# EAGLE board gate433 (EAGLE 7.6.0)
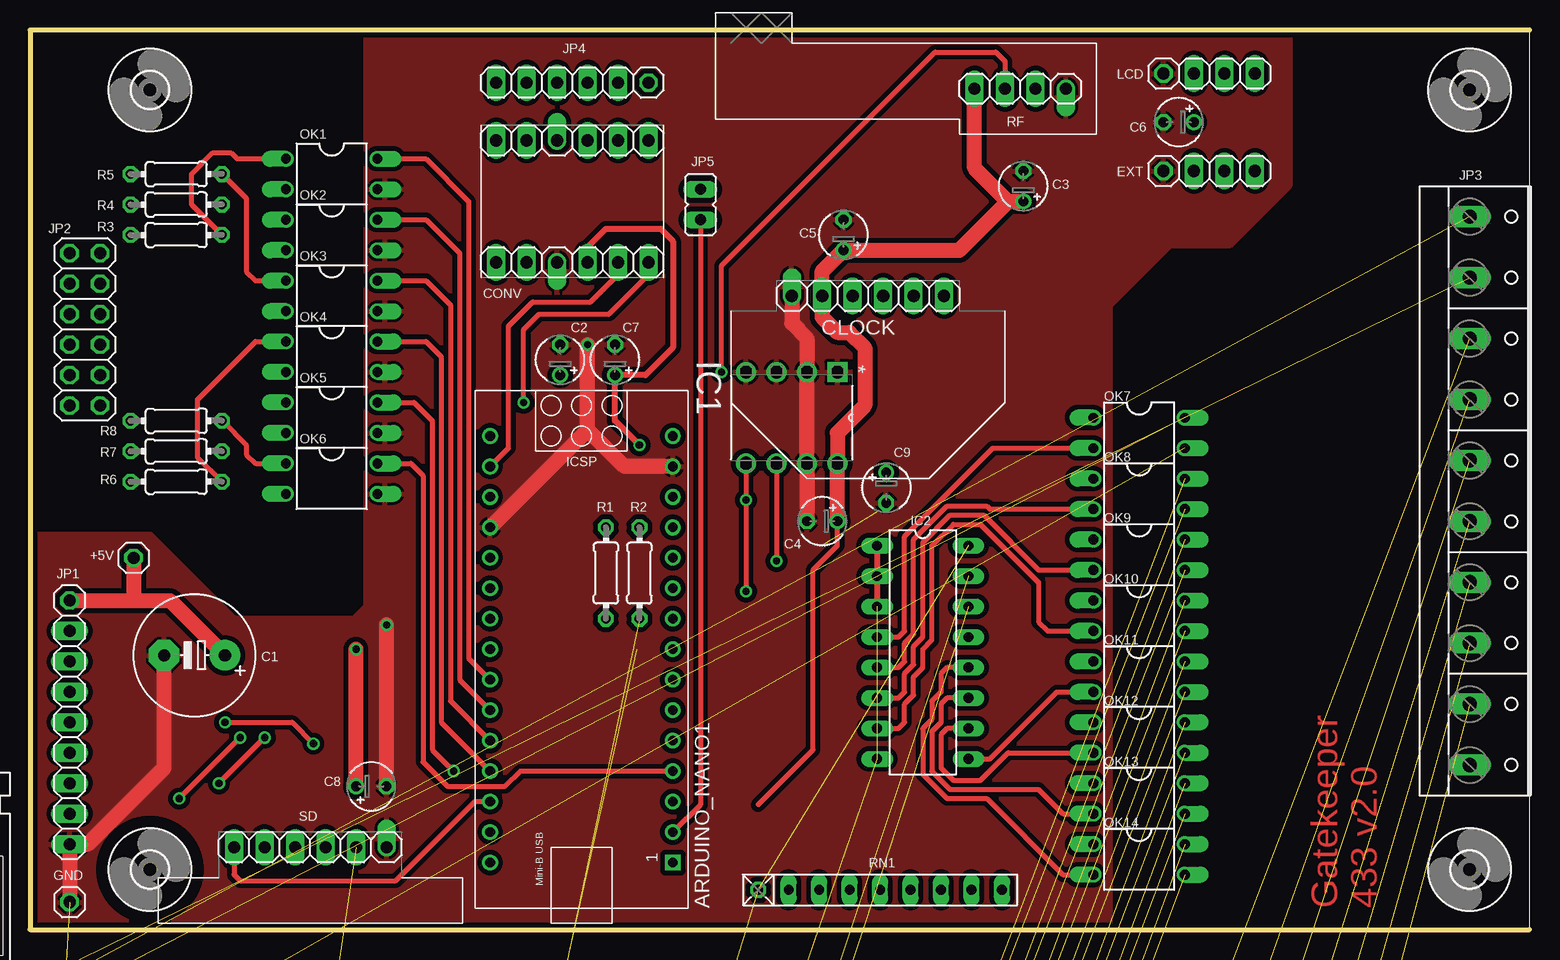
[diagram p0: board, top side]
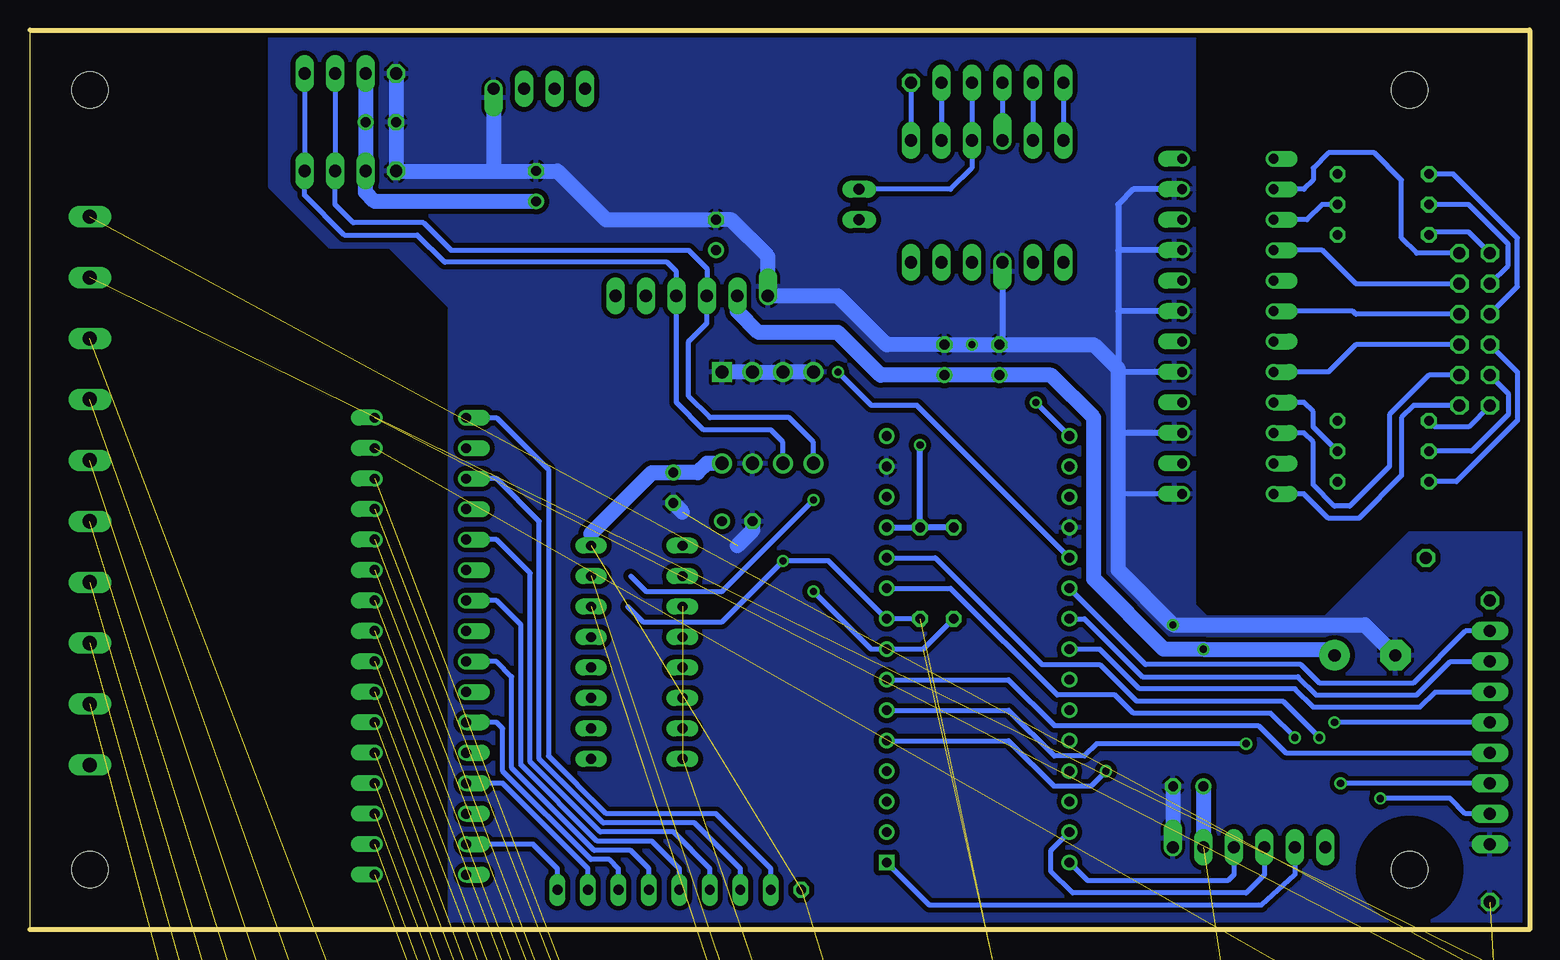
[diagram p1: board, bottom side, seen from below]

Size 125 x 75 mm. Coordinates in mm from the lower left corner, seen from the top.
Outline: 0,0 125,0 125,75 0,75 0,0
Copper layers (1*16): Top 0.035mm / dielectric 1.5mm / Bottom 0.035mm
Design rules "HuGyártás": minimum track width 10mil, minimum drill 0.5mm, track to track 8mil, track to pad 8mil, pad to pad 8mil, via to via 8mil, smd to smd 8mil, copper to edge 8mil, drill to drill 8mil, minimum pad ring 10mil, minimum via ring 8mil, stop-mask expansion 4mil, vias tented up to drill 20mil, thermal gap 10mil

## Footprints (pad centres in the part's own frame; a part is rotated, then mirrored left to right if it is on the bottom)
1X01 = drill 1.016 octagon: 1 0,0
ARDUINO_NANO = drill 0.8 square: 1 -20.32,-7.62 | drill 0.8: 2 -17.78,-7.62; 3 -15.24,-7.62; 4 -12.7,-7.62; 5 -10.16,-7.62; 6 -7.62,-7.62; 7 -5.08,-7.62; 8 -2.54,-7.62; 9 0,-7.62; 10 2.54,-7.62; 11 5.08,-7.62; 12 7.62,-7.62; 13 10.16,-7.62; 14 12.7,-7.62; 15 15.24,-7.62; 16 15.24,7.62; 17 12.7,7.62; 18 10.16,7.62; 19 7.62,7.62; 20 5.08,7.62; 21 2.54,7.62; 22 0,7.62; 23 -2.54,7.62; 24 -5.08,7.62; 25 -7.62,7.62; 26 -10.16,7.62; 27 -12.7,7.62; 28 -15.24,7.62; 29 -17.78,7.62; 30 -20.32,7.62
E5-10,5 = drill 1.016 pad 2.54: + -2.54,0 | drill 1.016 pad 2.54 octagon: - 2.54,0
TT2D4 = drill 0.813: + -1.27,0 | drill 0.813 octagon: - 1.27,0
ZS-042 = drill 1.016 offset: 1 -6.35,0 | drill 1.016 long: 2 -3.81,0; 3 -1.27,0; 4 1.27,0; 5 3.81,0; 6 6.35,0
LEVELCONV = drill 1.016 long: 1 -6.35,-5.08; 2 -3.81,-5.08; 3 -1.27,-5.08; 5 3.81,-5.08; 6 6.35,-5.08; 7 6.35,5.08; 8 3.81,5.08; 10 -1.27,5.08; 11 -3.81,5.08; 12 -6.35,5.08 | drill 1.016 offset: 4 1.27,-5.08; 9 1.27,5.08
ZDIO-5 = drill 0.813 octagon: A 2.54,0; C -2.54,0
1X04 = drill 1.016 octagon: 1 -3.81,0 | drill 1.016 long: 2 -1.27,0; 3 1.27,0; 4 3.81,0
DIP254P762X533-8 = drill 1.118 square: 1 -7.62,7.62 | drill 1.118: 2 -7.62,5.08; 3 -7.62,2.54; 4 -7.62,0; 5 0,0; 6 0,2.54; 7 0,5.08; 8 0,7.62
DIL16 = drill 0.813 long: 1 -8.89,-3.81; 2 -6.35,-3.81; 3 -3.81,-3.81; 4 -1.27,-3.81; 5 1.27,-3.81; 6 3.81,-3.81; 7 6.35,-3.81; 8 8.89,-3.81; 9 8.89,3.81; 10 6.35,3.81; 11 3.81,3.81; 12 1.27,3.81; 13 -1.27,3.81; 14 -3.81,3.81; 15 -6.35,3.81; 16 -8.89,3.81
1X09 = drill 1.016 octagon: 1 -10.16,0 | drill 1.016 long: 2 -7.62,0; 3 -5.08,0; 4 -2.54,0; 5 0,0; 6 2.54,0; 7 5.08,0; 8 7.62,0; 9 10.16,0
2X06 = drill 1.016 octagon: 1 -6.35,-1.27; 2 -6.35,1.27; 3 -3.81,-1.27; 4 -3.81,1.27; 5 -1.27,-1.27; 6 -1.27,1.27; 7 1.27,-1.27; 8 1.27,1.27; 9 3.81,-1.27; 10 3.81,1.27; 11 6.35,-1.27; 12 6.35,1.27
W237-10P = drill 1.194 long: 1 -22.86,-0.635; 2 -17.78,-0.635; 3 -12.7,-0.635; 4 -7.62,-0.635; 5 -2.54,-0.635; 6 2.54,-0.635; 7 7.62,-0.635; 8 12.7,-0.635; 9 17.78,-0.635; 10 22.86,-0.635
1X06 = drill 1.016 octagon: 1 -6.35,0 | drill 1.016 long: 2 -3.81,0; 3 -1.27,0; 4 1.27,0; 5 3.81,0; 6 6.35,0
JP1 = drill 0.914 long: 1 0,-1.27; 2 0,1.27
2X08 = drill 1.016 octagon: 1 -8.89,-1.27; 2 -8.89,1.27; 3 -6.35,-1.27; 4 -6.35,1.27; 5 -3.81,-1.27; 6 -3.81,1.27; 7 -1.27,-1.27; 8 -1.27,1.27; 9 1.27,-1.27; 10 1.27,1.27; 11 3.81,-1.27; 12 3.81,1.27; 13 6.35,-1.27; 14 6.35,1.27; 15 8.89,-1.27; 16 8.89,1.27
DIL04 = drill 0.813 offset: 1 -1.27,-3.81; 2 1.27,-3.81; 3 1.27,3.81; 4 -1.27,3.81
TO220BH = drill 1.118 long: D 0,-6.35; G -2.54,-6.35; S 2.54,-6.35 | hole 3.302: 0,11.176
0204/7 = drill 0.813 octagon: 1 -3.81,0; 2 3.81,0
RF = drill 1.016 offset: 1 -3.81,0 | drill 1.016 long: 2 -1.27,0; 3 1.27,0; 4 3.81,0
RN-9 = drill 0.813 octagon: 1 -10.16,0 | drill 0.813 long: 2 -7.62,0; 3 -5.08,0; 4 -2.54,0; 5 0,0; 6 2.54,0; 7 5.08,0; 8 7.62,0; 9 10.16,0
MICROSD = drill 1.016 offset: 1 -6.35,0 | drill 1.016 long: 2 -3.81,0; 3 -1.27,0; 4 1.27,0; 5 3.81,0; 6 6.35,0
3,0 = hole 3: 0,0

## Placement (x,y rotation side)
+5V  [1X01]  8.64,30.99 0 top
ARDUINO_NANO1  [ARDUINO_NANO]  45.97,25.91 90 top
C1  3300uF/10V  [E5-10,5]  13.72,22.86 180 top
C2  10uF/16V  [TT2D4]  44.2,47.5 90 top
C3  1uF  [TT2D4]  82.8,61.98 90 top
C4  1uF  [TT2D4]  66.04,34.04 180 top
C5  1uF  [TT2D4]  67.82,57.91 90 top
C6  1uF  [TT2D4]  95.76,67.31 180 top
C7  1uF  [TT2D4]  48.77,47.5 90 top
C8  100nF  [TT2D4]  28.45,11.94 0 top
C9  1uF  [TT2D4]  71.37,36.83 270 top
CLOCK  ZS-042  [ZS-042]  69.85,52.83 0 top
CONV  LEVELCONV  [LEVELCONV]  45.21,60.71 180 top
D1  [ZDIO-5]  -8.38,-21.34 0 top  (outside the outline)
D2  [ZDIO-5]  -8.38,-289.56 0 top  (outside the outline)
D3  [ZDIO-5]  -8.38,-318.26 0 top  (outside the outline)
D4  [ZDIO-5]  -8.38,-346.96 0 top  (outside the outline)
D5  [ZDIO-5]  -8.38,-375.67 0 top  (outside the outline)
D6  [ZDIO-5]  -8.38,-404.37 0 top  (outside the outline)
D7  [ZDIO-5]  -8.38,-433.07 0 top  (outside the outline)
D8  [ZDIO-5]  -8.38,-461.77 0 top  (outside the outline)
EXT  [1X04]  98.3,63.25 0 top
GND  [1X01]  3.3,2.29 0 top
IC1  24LC512P  [DIP254P762X533-8]  59.69,38.86 270 top
IC2  PCF8574P  [DIL16]  74.42,23.11 270 top
IOEXT1  [1X04]  -6.35,-225.81 0 top  (outside the outline)
IOEXT2  [1X04]  -6.35,-220.22 0 top  (outside the outline)
JP1  [1X09]  3.3,17.27 270 top
JP2  [2X06]  4.57,50.04 270 top
JP3  [W237-10P]  120.65,36.58 270 top
JP4  [1X06]  45.21,70.61 180 top
JP5  [JP1]  55.88,60.45 0 top
JP6  [2X08]  -1.27,-232.92 0 top  (outside the outline)
LCD  [1X04]  98.3,71.37 0 top
OK1  PC817  [DIL04]  25.15,62.99 270 top
OK2  PC817  [DIL04]  25.15,57.91 270 top
OK3  PC817  [DIL04]  25.15,52.83 270 top
OK4  PC817  [DIL04]  25.15,47.75 270 top
OK5  PC817  [DIL04]  25.15,42.67 270 top
OK6  PC817  [DIL04]  25.15,37.59 270 top
OK7  PC817  [DIL04]  92.46,41.4 270 top
OK8  PC817  [DIL04]  92.46,36.32 270 top
OK9  PC817  [DIL04]  92.46,31.24 270 top
OK10  PC817  [DIL04]  92.46,26.16 270 top
OK11  PC817  [DIL04]  92.46,21.08 270 top
OK12  PC817  [DIL04]  92.46,16 270 top
OK13  PC817  [DIL04]  92.46,10.92 270 top
OK14  PC817  [DIL04]  92.46,5.84 270 top
Q1  IRLZ44N  [TO220BH]  -6.86,-1.52 0 top  (outside the outline)
Q2  IRLZ44N  [TO220BH]  -6.86,-277.62 0 top  (outside the outline)
Q3  IRLZ44N  [TO220BH]  -6.86,-306.32 0 top  (outside the outline)
Q4  IRLZ44N  [TO220BH]  -6.86,-335.03 0 top  (outside the outline)
Q5  IRLZ44N  [TO220BH]  -6.86,-363.73 0 top  (outside the outline)
Q6  IRLZ44N  [TO220BH]  -6.86,-392.43 0 top  (outside the outline)
Q7  IRLZ44N  [TO220BH]  -6.86,-421.13 0 top  (outside the outline)
Q8  IRLZ44N  [TO220BH]  -6.86,-449.83 0 top  (outside the outline)
R1  4.7K  [0204/7]  48.01,29.72 90 top
R2  2.2K  [0204/7]  50.8,29.72 90 top
R3  1K  [0204/7]  12.19,57.91 0 top
R4  1K  [0204/7]  12.19,60.45 0 top
R5  1K  [0204/7]  12.19,62.99 0 top
R6  1K  [0204/7]  12.19,37.34 0 top
R7  1K  [0204/7]  12.19,39.88 0 top
R8  1K  [0204/7]  12.19,42.42 0 top
R9  15k  [0204/7]  -7.11,-12.7 0 top  (outside the outline)
R10  33k  [0204/7]  -7.11,-16.51 0 top  (outside the outline)
R11  15k  [0204/7]  -7.11,-238.25 0 top  (outside the outline)
R12  15k  [0204/7]  -7.11,-242.06 0 top  (outside the outline)
R13  15k  [0204/7]  -7.11,-245.87 0 top  (outside the outline)
R14  15k  [0204/7]  -7.11,-249.68 0 top  (outside the outline)
R15  15k  [0204/7]  -7.11,-253.49 0 top  (outside the outline)
R16  15k  [0204/7]  -7.11,-257.3 0 top  (outside the outline)
R17  15k  [0204/7]  -7.11,-261.11 0 top  (outside the outline)
R18  33k  [0204/7]  0.25,-288.8 0 top  (outside the outline)
R19  33k  [0204/7]  0.25,-317.5 0 top  (outside the outline)
R20  33k  [0204/7]  0.25,-346.2 0 top  (outside the outline)
R21  33k  [0204/7]  0.25,-374.9 0 top  (outside the outline)
R22  33k  [0204/7]  0.25,-403.61 0 top  (outside the outline)
R23  33k  [0204/7]  0.25,-432.31 0 top  (outside the outline)
R24  33k  [0204/7]  0.25,-461.01 0 top  (outside the outline)
RF  RF  [RF]  82.55,70.1 180 top
RN1  8x220  [RN-9]  70.87,3.3 0 top
SD  MICROSD  [MICROSD]  23.37,6.86 180 top
U$1  [3,0]  10,5 0 top
U$2  [3,0]  120,5 0 top
U$3  [3,0]  120,70 0 top
U$4  [3,0]  10,70 0 top

## Library data of the parts
+5V CLOCK CONV D1-D8 EXT GND IOEXT1 IOEXT2 JP1 JP2 JP4-JP6 LCD Q1-Q8 RF SD U$1-U$4 = gate433
ARDUINO_NANO1 = ArduinoNanoV30
C1-C9 = resistor
IC1 = gate433; MPN: AT24C512B-PU25; OC_FARNELL: 1362655; OC_NEWARK: -; PACKAGE: PDIP-8; SUPPLIER: Atmel
IC2 = gate433; MPN: PCF8574PN; OC_FARNELL: 204020; OC_NEWARK: 11N8515
JP3 RN1 = gate433; OC_FARNELL: unknown; OC_NEWARK: unknown
OK1-OK14 = gate433; MPN: PC817X4J000F; OC_FARNELL: 9707727; OC_NEWARK: 97K7059
R1-R24 = resistor; SPICEPREFIX: R

## Nets
+3V3: ARDUINO_NANO1.2 JP5.1
+5V: +5V.1 ARDUINO_NANO1.12 C1.+ C2.+ C3.+ C4.+ C5.+ C6.+ C7.+ C8.+ C9.+ CLOCK.2 CONV.10 EXT.2 IC1.8 IOEXT1.2 JP1.1 LCD.2 R1.2 R2.2 RF.4 SD.2
+12V: R9.2 R11.2 R12.2 R13.2 R14.2 R15.2 R16.2 R17.2
A2: ARDUINO_NANO1.6 JP1.5
A3: ARDUINO_NANO1.7 JP1.6
A6: ARDUINO_NANO1.10 JP1.7
A7: ARDUINO_NANO1.11 JP1.8
D3: ARDUINO_NANO1.21 JP1.2
D4: ARDUINO_NANO1.22 JP1.3
D5: ARDUINO_NANO1.23 JP1.4
GND: ARDUINO_NANO1.14 ARDUINO_NANO1.19 C1.- C2.- C3.- C4.- C5.- C6.- C7.- C8.- C9.- CLOCK.1 CONV.9 EXT.1 GND.1 IC1.1 IC1.2 IC1.3 IC1.4 IC1.7 IOEXT1.1 JP1.9 LCD.1 OK1.3 OK2.3 OK3.3 OK4.3 OK5.3 OK6.3 RF.1 SD.1
GNDI1: JP2.2 OK1.2
GNDI2: JP2.4 OK2.2
GNDI3: JP2.6 OK3.2
GNDI4: JP2.8 OK4.2
GNDI5: JP2.10 OK5.2
GNDI6: JP2.12 OK6.2
N$1: CONV.1 JP4.1
N$2: JP2.11 R8.1
N$3: OK1.1 R3.2
N$4: ARDUINO_NANO1.27 OK4.4
N$5: ARDUINO_NANO1.26 OK3.4
N$6: ARDUINO_NANO1.25 OK2.4
N$7: JP2.9 R7.1
N$8: CONV.2 JP4.2
N$9: CONV.3 JP4.3 JP5.2
N$10: CONV.5 JP4.5
N$11: CONV.6 JP4.6
N$12: CONV.4 JP4.4
N$13: OK7.1 RN1.2
N$14: ARDUINO_NANO1.28 SD.6
N$15: ARDUINO_NANO1.1 SD.5
N$16: ARDUINO_NANO1.29 SD.4
N$17: ARDUINO_NANO1.30 SD.3
N$18: ARDUINO_NANO1.24 OK1.4
N$19: JP2.1 R3.1
N$20: JP3.2 Q1.D
N$21: JP6.1 OK7.4 R9.1
N$22: JP6.3 OK8.4 R11.1
N$23: JP6.5 OK9.4 R12.1
N$24: JP6.7 OK10.4 R13.1
N$25: JP6.9 OK11.4 R15.1
N$26: JP6.11 OK12.4 R14.1
N$27: JP6.13 OK13.4 R16.1
N$28: JP2.3 R4.1
N$29: ARDUINO_NANO1.4 OK6.4
N$30: ARDUINO_NANO1.5 OK5.4
N$31: IC2.12 OK14.2
N$32: IC2.11 OK13.2
N$33: ARDUINO_NANO1.20 RF.3
N$34: IC2.10 OK12.2
N$35: IC2.9 OK11.2
N$36: JP2.5 R5.1
N$37: JP2.7 R6.1
N$38: OK2.1 R4.2
N$39: OK3.1 R5.2
N$40: OK4.1 R6.2
N$41: OK5.1 R7.2
N$42: OK6.1 R8.2
N$43: IC2.7 OK10.2
N$44: IC2.6 OK9.2
N$45: IC2.5 OK8.2
N$46: IC2.4 OK7.2
N$47: OK8.1 RN1.3
N$48: OK9.1 RN1.4
N$49: OK10.1 RN1.5
N$50: OK11.1 RN1.6
N$51: OK12.1 RN1.7
N$52: OK13.1 RN1.8
N$53: OK14.1 RN1.9
N$54: D1.C JP6.2 OK7.3 Q1.G R10.2
N$55: IC2.15 IOEXT2.3
N$56: JP6.15 OK14.4 R17.1
N$57: D2.C JP6.4 OK8.3 Q2.G R18.2
N$58: JP3.10
N$59: ARDUINO_NANO1.16 CONV.12
N$60: D3.C JP6.6 OK9.3 Q3.G R19.2
N$61: D4.C JP6.8 OK10.3 Q4.G R20.2
N$62: D5.C JP6.10 OK11.3 Q5.G R21.2
N$63: D6.C JP6.12 OK12.3 Q6.G R22.2
N$64: IC2.14 IOEXT2.4
N$65: D7.C JP6.14 OK13.3 Q7.G R23.2
N$66: D8.C JP6.16 OK14.3 Q8.G R24.2
N$67: JP3.3 Q2.D
N$68: ARDUINO_NANO1.17 CONV.11
N$69: IC2.16 IOEXT2.2 RN1.1
N$71: IC2.1 IC2.2 IC2.3 IC2.8 IOEXT2.1
N$72: JP3.4 Q3.D
N$77: JP3.5 Q4.D
N$81: JP3.6 Q5.D
N$85: JP3.7 Q6.D
N$89: JP3.8 Q7.D
N$93: JP3.9 Q8.D
PE: D1.A D2.A D3.A D4.A D5.A D6.A D7.A D8.A JP3.1 Q1.S Q2.S Q3.S Q4.S Q5.S Q6.S Q7.S Q8.S R10.1 R18.1 R19.1 R20.1 R21.1 R22.1 R23.1 R24.1
SCL: ARDUINO_NANO1.9 CLOCK.4 EXT.4 IC1.6 IOEXT1.4 LCD.4 R2.1
SDA: ARDUINO_NANO1.8 CLOCK.3 EXT.3 IC1.5 IOEXT1.3 LCD.3 R1.1
VIN: ARDUINO_NANO1.15

## Tracks (layer width: path | path; a pad name or v marks a point on that pad's centre or on a via)
+3V3
  Top 0.406: JP5.1 55.88,10.41 ARDUINO_NANO1.2
+5V  (via drill 0.6)  (1 unrouted)
  Top 0.406: 60.71,10.41 65.28,14.99 65.28,29.97 67.31,32 C4.+
  Top 0.508: CONV.10 46.48,56.9 48.01,58.42 52.58,58.42 53.59,57.4 53.59,48.51 51.31,46.23 C7.+ 48.77,42.42 v50.8,40.39
  Top 1.27: C8.+ v27.18,23.37 | JP1.1 8.64,27.43 | 8.64,27.43 11.68,27.43 C1.+ | +5V.1 8.64,27.43 | C3.+ 81.53,60.71 | 81.53,60.71 78.74,63.5 RF.4 | C4.+ IC1.8 67.31,41.4 69.6,43.69 69.6,48.51 68.33,49.78 67.31,49.78 66.04,51.05 CLOCK.2 66.04,54.86 C5.+ 77.47,56.64 81.53,60.71
  Bottom 0.508: R1.2 R2.2 | ARDUINO_NANO1.12 R2.2 | R2.2 v50.8,40.39
  Bottom 1.27: C8.+ SD.2 | LCD.2 C6.+ EXT.2 97.03,61.47 96.27,60.71 C3.+ | C1.+ 16.76,23.37 v27.18,23.37 30.48,23.37 36.32,29.21 36.32,42.67 39.88,46.23 C2.+ C7.+ 54.1,46.23 57.66,49.78 64.26,49.78 66.04,51.56 CLOCK.2 | 78.23,33.02 73.15,38.1 C9.+ 69.34,38.1 68.58,38.86 IC1.8
+12V  (7 unrouted)
A2  (via drill 0.6)
  Top 0.406: v16.26,17.27 21.84,17.27 v23.62,15.49
  Bottom 0.406: ARDUINO_NANO1.6 43.43,18.29 39.62,14.48 37.08,14.48 36.07,15.49 v23.62,15.49 | JP1.5 v16.26,17.27
A3
  Bottom 0.406: ARDUINO_NANO1.7 43.43,20.83 39.62,17.02 22.61,17.02 20.32,14.73 JP1.6
A6  (via drill 0.6)
  Top 0.406: v15.75,12.19 v19.56,16
  Bottom 0.406: ARDUINO_NANO1.10 48.26,28.45 39.37,19.56 34.54,19.56 33.02,18.03 21.59,18.03 v19.56,16 | JP1.7 v15.75,12.19
A7  (via drill 0.6)
  Top 0.406: v17.53,16 v12.45,10.92
  Bottom 0.406: ARDUINO_NANO1.11 49.53,30.99 40.64,22.1 35.81,22.1 32.77,19.05 20.57,19.05 v17.53,16 | JP1.8 5.33,9.65 6.6,10.92 v12.45,10.92
D3
  Bottom 0.406: ARDUINO_NANO1.21 32,22.1 19.05,22.1 17.53,20.57 9.65,20.57 5.33,24.89 JP1.2
D4
  Bottom 0.406: ARDUINO_NANO1.22 37.08,25.91 32.26,21.08 19.3,21.08 17.78,19.56 9.4,19.56 6.6,22.35 JP1.3
D5
  Bottom 0.406: ARDUINO_NANO1.23 35.81,23.37 32.51,20.07 19.56,20.07 18.03,18.54 9.14,18.54 7.87,19.81 3.56,19.81 JP1.4
GND  (via drill 0.6)  (2 unrouted)
  Top 1.27: C8.- v29.72,25.4 | ARDUINO_NANO1.19 46.48,41.66 | 46.48,41.66 v46.48,48.77 | ARDUINO_NANO1.14 49.53,38.61 46.48,41.66 | C1.- 11.18,13.46 4.83,7.11 JP1.9 GND.1 | C4.- IC1.7 IC1.2 64.77,49.28 63.5,50.55 CLOCK.1
  Bottom 0.406: 34.29,46.48 34.29,46.74 | OK6.3 34.29,36.32
  Bottom 0.508: OK1.3 33.02,61.72 34.29,60.45 34.29,56.64 | 34.29,56.64 34.29,51.56 | 34.29,51.56 34.29,46.48 OK4.3 | OK2.3 34.29,56.64 | OK3.3 34.29,51.56 | OK5.3 34.29,41.4 | CONV.9 43.94,49.02 C2.-
  Bottom 1.27: C8.- SD.1 | 34.29,46.48 34.29,41.4 34.29,36.32 34.29,29.97 v29.72,25.4 13.72,25.4 C1.- | 34.29,46.74 36.32,48.77 C2.- v46.48,48.77 C7.- 53.59,48.77 57.66,52.83 CLOCK.1 63.5,56.13 66.55,59.18 C5.- 76.96,59.18 81.03,63.25 C3.- 86.36,63.25 | LCD.1 C6.- EXT.1 86.36,63.25 | RF.1 86.36,63.25 | IC1.4 IC1.3 IC1.2 IC1.1 | C9.- 70.61,34.8 | C4.- 64.77,33.27 66.04,32
  pour Bottom (isolate 0.406): 0,33 10,33 17,26 27,26 28,27 28,75 105,75 105,62 100,57 95,57 90,52 90,0 0,0
  pour Top (isolate 0.406): 0,33 10,33 17,26 27,26 28,27 28,75 105,75 105,62 100,57 95,57 90,52 90,0 0,0
GNDI1
  Bottom 0.406: JP2.2 9.4,56.39 10.67,57.66 10.67,62.48 12.95,64.77 16.76,64.77 18.03,63.5 18.03,62.48 18.8,61.72 OK1.2
GNDI2
  Bottom 0.406: JP2.4 14.48,53.85 17.27,56.64 OK2.2
GNDI3
  Bottom 0.406: JP2.6 14.48,51.31 14.73,51.56 OK3.2
GNDI4
  Bottom 0.406: JP2.8 14.48,48.77 16.76,46.48 OK4.2
GNDI5
  Bottom 0.406: JP2.10 8.38,46.23 11.68,42.93 11.68,38.61 14.99,35.31 16.26,35.31 18.03,37.08 18.03,40.64 18.8,41.4 OK5.2
GNDI6
  Bottom 0.406: JP2.12 9.65,43.69 10.67,42.67 10.67,37.85 14.22,34.29 16.76,34.29 18.8,36.32 OK6.2
N$1
  Bottom 0.406: JP4.1 CONV.1
N$2
  Bottom 0.406: JP2.11 5.08,41.91 7.87,41.91 R8.1
N$3
  Top 0.406: R3.2 13.46,60.45 13.46,62.99 15.24,64.77 16.76,64.77 17.27,64.26 OK1.1
N$4
  Top 0.406: OK4.4 33.02,49.02 34.29,47.75 34.29,17.27 ARDUINO_NANO1.27
N$5
  Top 0.406: OK3.4 33.02,54.1 35.05,52.07 35.05,19.05 ARDUINO_NANO1.26
N$6
  Top 0.406: OK2.4 33.02,59.18 35.81,56.39 35.81,20.83 ARDUINO_NANO1.25
N$7
  Bottom 0.406: JP2.9 1.78,44.7 1.78,42.93 4.83,39.88 R7.1
N$8
  Bottom 0.406: JP4.2 CONV.2
N$9
  Bottom 0.406: JP4.3 CONV.3 46.48,63.5 48.26,61.72 JP5.2
N$10
  Bottom 0.406: JP4.5 CONV.5
N$11
  Bottom 0.406: JP4.6 CONV.6
N$12
  Bottom 0.406: JP4.4 CONV.4
N$13
  Bottom 0.406: RN1.2 63.25,5.08 67.82,9.65 76.96,9.65 81.79,14.48 81.79,38.35 86.11,42.67 OK7.1
N$14
  Top 0.406: SD.6 17.02,4.57 17.53,4.06 30.48,4.06 37.08,10.67 ARDUINO_NANO1.28
N$15
  Bottom 0.406: SD.5 19.56,4.57 22.35,2.03 50.04,2.03 ARDUINO_NANO1.1
N$16
  Bottom 0.406: SD.4 22.1,4.57 23.62,3.05 38.1,3.05 39.88,4.83 39.88,6.6 ARDUINO_NANO1.29
N$17
  Bottom 0.406: ARDUINO_NANO1.30 36.83,4.06 25.15,4.06 24.64,4.57 SD.3
N$18
  Top 0.406: OK1.4 33.02,64.26 36.58,60.71 36.58,22.61 ARDUINO_NANO1.24
N$19
  Bottom 0.406: JP2.1 5.08,58.17 8.13,58.17 R3.1
N$20  (1 unrouted)
N$21  (2 unrouted)
N$22  (2 unrouted)
N$23  (2 unrouted)
N$24  (2 unrouted)
N$25  (2 unrouted)
N$26  (2 unrouted)
N$27  (2 unrouted)
N$28
  Bottom 0.406: JP2.3 1.78,55.37 1.78,57.15 5.08,60.45 R4.1
N$29
  Top 0.406: ARDUINO_NANO1.4 40.89,13.21 39.62,11.94 34.8,11.94 32.77,13.97 32.77,37.85 31.75,38.86 OK6.4
N$30  (via drill 0.6)
  Top 0.406: OK5.4 32,43.94 33.53,42.42 33.53,14.99 v35.31,13.21
  Bottom 0.406: ARDUINO_NANO1.5 43.43,15.75 39.62,11.94 36.58,11.94 v35.31,13.21
N$31
  Top 0.406: IC2.12 76.45,21.84 75.95,21.34 75.95,19.81 75.18,19.05 75.18,17.53 74.42,16.76 74.42,12.95 76.45,10.92 79.76,10.92 86.11,4.57 OK14.2
N$32
  Top 0.406: IC2.11 76.45,19.3 75.95,18.8 75.95,17.27 75.18,16.51 75.18,13.21 76.71,11.68 84.07,11.68 86.11,9.65 OK13.2
N$33  (via drill 0.6)
  Top 0.406: v57.66,46.48 57.66,55.37 75.44,73.15 80.52,73.15 81.28,72.39 RF.3
  Bottom 0.406: ARDUINO_NANO1.20 51.05,43.69 54.86,43.69 v57.66,46.48
N$34
  Top 0.406: IC2.10 76.45,16.76 75.95,16.26 75.95,13.46 76.96,12.45 79.25,12.45 81.53,14.73 OK12.2
N$35
  Top 0.406: IC2.9 80.01,14.22 85.6,19.81 OK11.2
N$36
  Bottom 0.406: JP2.5 1.02,53.59 1.02,57.66 6.35,62.99 R5.1
N$37
  Bottom 0.406: JP2.7 1.02,46.48 1.02,42.42 6.1,37.34 R6.1
N$38
  Bottom 0.406: R4.2 17.27,60.45 18.54,59.18 OK2.1
N$39
  Top 0.406: R5.2 18.03,60.96 18.03,54.86 18.8,54.1 OK3.1
N$40
  Top 0.406: R6.2 13.97,39.37 13.97,44.2 18.8,49.02 OK4.1
N$41
  Bottom 0.406: OK5.1 18.8,43.94 18.03,43.18 18.03,41.91 R7.2
N$42
  Top 0.406: R8.2 18.03,40.39 18.03,39.62 18.8,38.86 OK6.1
N$43
  Top 0.406: IC2.7 72.39,16.76 72.9,17.27 72.9,18.8 73.66,19.56 73.66,21.08 74.42,21.84 74.42,23.37 75.18,24.13 75.18,32 76.96,33.78 79.25,33.78 84.07,28.96 84.07,25.65 84.84,24.89 OK10.2
N$44
  Top 0.406: IC2.6 72.39,19.3 72.9,19.81 72.9,21.34 73.66,22.1 73.66,23.62 74.42,24.38 74.42,32.26 76.71,34.54 79.5,34.54 84.07,29.97 OK9.2
N$45
  Top 0.406: IC2.5 72.39,21.84 72.9,22.35 72.9,23.88 73.66,24.64 73.66,32.51 76.45,35.31 79.76,35.31 80.01,35.05 OK8.2
N$46
  Top 0.406: IC2.4 72.39,24.38 72.9,24.89 72.9,32.77 80.26,40.13 OK7.2
N$47
  Bottom 0.406: RN1.3 65.79,5.08 69.6,8.89 77.22,8.89 82.55,14.22 82.55,34.04 86.11,37.59 OK8.1
N$48
  Bottom 0.406: RN1.4 68.33,5.08 71.37,8.13 77.47,8.13 83.31,13.97 83.31,29.72 86.11,32.51 OK9.1
N$49
  Bottom 0.406: RN1.5 70.87,5.08 73.15,7.37 77.72,7.37 84.07,13.72 84.07,25.4 86.11,27.43 OK10.1
N$50
  Bottom 0.406: RN1.6 73.41,5.08 74.93,6.6 77.98,6.6 84.84,13.46 84.84,21.08 86.11,22.35 OK11.1
N$51
  Bottom 0.406: RN1.7 75.95,5.08 76.71,5.84 78.23,5.84 85.6,13.21 85.6,16.76 86.11,17.27 OK12.1
N$52
  Bottom 0.406: RN1.8 78.49,5.08 85.6,12.19 OK13.1
N$53
  Bottom 0.406: RN1.9 81.03,5.08 83.06,7.11 OK14.1
N$54  (4 unrouted)
N$55  (1 unrouted)
N$56  (2 unrouted)
N$57  (4 unrouted)
N$59  (via drill 0.6)
  Top 0.406: CONV.12 51.56,54.61 48.26,51.31 42.42,51.31 41.15,50.04 v41.15,43.94
  Bottom 0.406: ARDUINO_NANO1.16 v41.15,43.94
N$60  (4 unrouted)
N$61  (4 unrouted)
N$62  (4 unrouted)
N$63  (4 unrouted)
N$64  (1 unrouted)
N$65  (4 unrouted)
N$66  (4 unrouted)
N$67  (1 unrouted)
N$68
  Top 0.406: CONV.11 49.02,54.61 46.74,52.32 41.91,52.32 39.88,50.29 39.88,40.13 ARDUINO_NANO1.17
N$69  (2 unrouted)
N$71  (2 unrouted)
  Top 0.508: IC2.1 IC2.2 IC2.3
N$72  (1 unrouted)
N$77  (1 unrouted)
N$81  (1 unrouted)
N$85  (1 unrouted)
N$89  (1 unrouted)
N$93  (1 unrouted)
PE  (24 unrouted)
SCL  (via drill 0.6)  (1 unrouted)
  Top 0.406: IC1.6 v62.23,30.73
  Bottom 0.406: LCD.4 EXT.4 102.11,61.21 98.81,57.91 92.71,57.91 90.42,55.63 71.88,55.63 71.12,54.86 CLOCK.4 71.12,43.94 68.83,41.66 63.25,41.66 62.23,40.64 IC1.6 | 75.18,26.92 73.91,25.65 67.31,25.65 v62.23,30.73 58.42,30.73 ARDUINO_NANO1.9 R2.1
SDA  (via drill 0.6)  (1 unrouted)
  Top 0.406: IC1.5 v59.69,35.81 v59.69,28.19
  Bottom 0.406: LCD.3 EXT.3 99.57,60.45 98.04,58.93 92.2,58.93 89.92,56.64 70.1,56.64 68.58,55.12 CLOCK.3 68.58,50.55 70.1,49.02 70.1,44.45 68.33,42.67 61.72,42.67 59.69,40.64 IC1.5 | 74.93,29.46 73.66,28.19 67.31,28.19 v59.69,35.81 | R1.1 50.55,23.37 ARDUINO_NANO1.8 54.86,23.37 v59.69,28.19

## Text on the board
Top: Gatekeeper / 433 v2.0